# Altium PCB pcb.PcbDoc (part 2 of 2)
Units mil, origin at the board's own origin, x right, y up, seen from the top; angles counter-clockwise.
Board outline 6000 x 4000 mil, 4 copper layers (Top Layer, Ground, Power, Bottom Layer), stack 64.6 mil thick; 209 components, 184 nets, 1089 pads, 303 vias.
Unrouted connection lines stored in the file: 45.
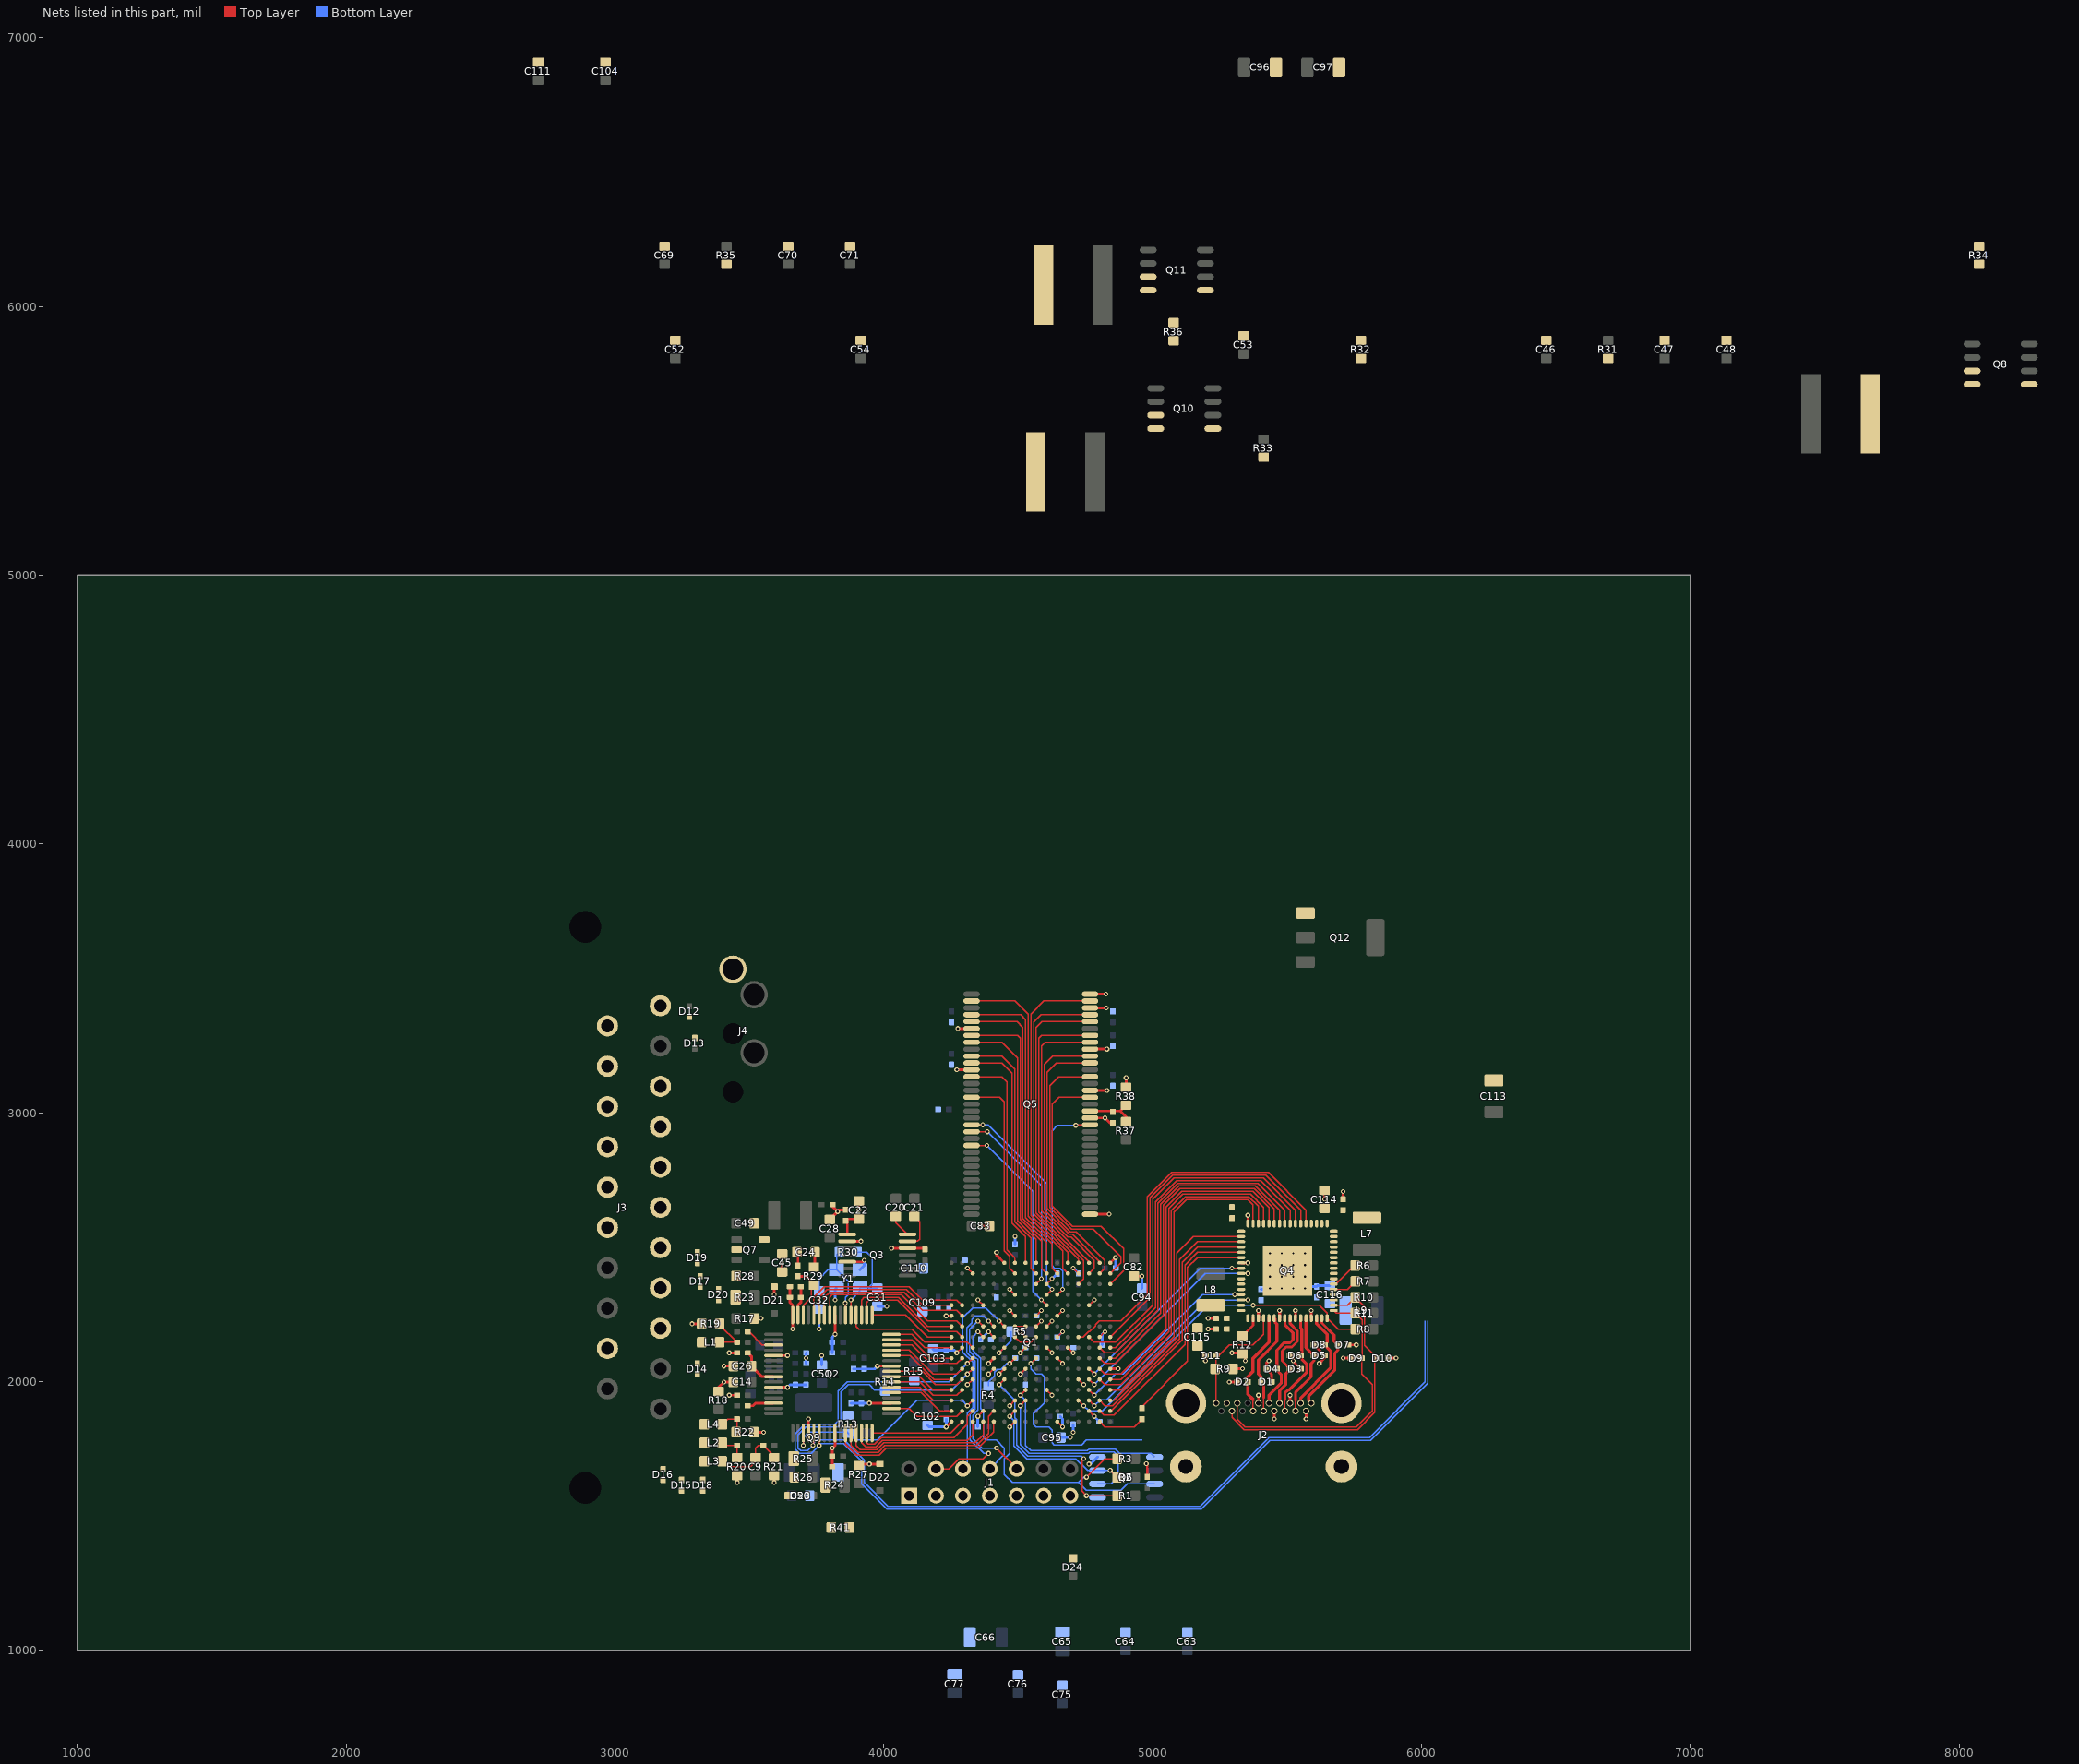
[diagram p2: the nets of this part, all layers, seen from the top]

## Via types
v1: diameter 18, hole 10, Top Layer to Bottom Layer, 287 vias
v2: diameter 19.68, hole 7.87, Top Layer to Bottom Layer, 16 vias

## Nets (pads, with @x,y where several pads share a name; then routed paths per layer and width w, separated by ;. In a path a pad name is that pad's centre, name@x,y a point inside that pad or via, vN(x,y) a via of type N, cw(c..) or ccw(c..) an arc to the next point about the centre after c; other vN are vias at no path point) (continued)
DONE: Q1.H10 R41.1 | length 773.4
  Top Layer w5: v1(4547.24,2066.93) Q1.H10@4566.93,2086.61
  Bottom Layer w5: v1(4547.24,2066.93) 4547.24,2047.24 4566.93,2027.56 4587.01,2027.56 4596.86,2017.72 4596.86,1919.69 4557.09,1879.92 4557.09,1840.55 4566.93,1830.71 4614.17,1830.71 4625.98,1818.9 4625.98,1771.65 4633.86,1763.78 4736.22,1763.78 4753.94,1781.5 4960.63,1781.5
DQ0: Q1.E2 Q5.2 | length 1256.7
  Top Layer w5: Q5.2@4326.77,3415.35 4488.19,3415.35 4537.4,3366.14 4537.4,2614.38 4665.35,2486.43 4665.35,2421.26 Q1.E2@4685.04,2401.57
DQ1: Q1.F2 Q5.4 | length 1201.8
  Top Layer w5: Q5.4@4326.77,3364.17 4509.69,3364.17 4527.4,3346.46 4527.4,2610.24 4625.98,2511.66 4625.98,2421.26 Q1.F2@4645.67,2401.57
DQ2: Q1.G1 Q5.5 | length 1112.4
  Top Layer w5: Q5.5@4326.77,3338.58 4495.75,3338.58 4517.4,3316.93 4517.4,2606.1 4606.3,2517.2 Q1.G1@4606.3,2440.94
DQ3: Q1.G2 Q5.7 | length 1101.7
  Top Layer w5: Q5.7@4326.77,3287.4 4497.56,3287.4 4507.4,3277.56 4507.4,2601.95 4586.61,2522.74 4586.61,2421.26 Q1.G2@4606.3,2401.57
DQ4: Q1.H1 Q5.8 | length 986.1
  Top Layer w5: Q5.8@4326.77,3261.81 4438.98,3261.81 4497.4,3203.39 4497.4,2597.81 4566.93,2528.28 Q1.H1@4566.93,2440.94
DQ5: Q1.H2 Q5.10 | length 974.3
  Top Layer w5: Q5.10@4326.77,3210.63 4438.98,3210.63 4487.4,3162.2 4487.4,2593.67 4547.24,2533.83 4547.24,2421.26 Q1.H2@4566.93,2401.57
DQ6: Q1.J1 Q5.11 | length 893
  Top Layer w5: Q5.11@4326.77,3185.04 4438.98,3185.04 4477.4,3146.61 4477.4,2589.53 4527.56,2539.37 Q1.J1@4527.56,2440.94
DQ7: Q1.K1 Q5.13 | length 825.5
  Top Layer w5: Q5.13@4326.77,3133.86 4438.98,3133.86 4458.66,3114.17 4458.66,2490.16 4488.19,2460.63 Q1.K1@4488.19,2440.94
DQ8: Q1.A2 Q5.54 | length 1036.5
  Top Layer w5: Q5.54@4767.72,3133.86 4650.87,3133.86 4617.4,3100.39 4617.4,2647.52 4697.95,2566.97 4779.2,2566.97 4881.89,2464.28 4881.89,2440.94 Q1.A2@4842.52,2401.57
DQ9: Q1.B2 Q5.56 | length 1033.8
  Top Layer w5: Q5.56@4767.72,3185.04 4642.83,3185.04 4607.4,3149.61 4607.4,2643.37 4693.8,2556.97 4716.65,2556.97 4822.84,2450.79 4822.84,2421.26 Q1.B2@4803.15,2401.57
DQ10: Q1.B1 Q5.57 | length 1013.7
  Top Layer w5: Q5.57@4767.72,3210.63 4628.9,3210.63 4597.4,3179.13 4597.4,2639.23 4689.66,2546.97 4701.42,2546.97 4803.15,2445.25 Q1.B1@4803.15,2440.94
DQ11: Q1.C2 Q5.59 | length 1128.7
  Top Layer w5: Q1.C2@4763.78,2401.57 4783.47,2421.26 4783.47,2450.79 4697.28,2536.97 4685.52,2536.97 4587.4,2635.09 4587.4,3248.03 4601.18,3261.81 Q5.59@4767.72,3261.81
DQ12: Q1.C1 Q5.60 | length 1108.6
  Top Layer w5: Q1.C1@4763.78,2440.94 4763.78,2445.25 4682.05,2526.97 4681.38,2526.97 4577.4,2630.95 4577.4,3277.56 4587.24,3287.4 Q5.60@4767.72,3287.4
DQ13: Q1.D3 Q5.62 | length 1245.7
  Top Layer w5: Q1.D3@4724.41,2362.2 4744.1,2381.89 4744.1,2450.79 4677.91,2516.97 4677.24,2516.97 4567.4,2626.81 4567.4,3316.93 4589.06,3338.58 Q5.62@4767.72,3338.58
DQ14: Q1.D1 Q5.63 | length 1186.6
  Top Layer w5: Q1.D1@4724.41,2440.94 4724.41,2455.66 4557.4,2622.66 4557.4,3336.61 4584.96,3364.17 Q5.63@4767.72,3364.17
DQ15: Q1.E1 Q5.65 | length 1222.9
  Top Layer w5: Q1.E1@4685.04,2440.94 4685.04,2480.88 4547.4,2618.52 4547.4,3366.14 4596.61,3415.35 Q5.65@4767.72,3415.35
ELPF: C23.2 Q2.30 R29.2 | length 203.7
  Top Layer w5: Q2.30@3700.79,2247.05 3700.79,2283.46 3730.16,2312.83 3730.16,2348.27 R29.2@3740.16,2358.27 R29.2@3740.16,2364.17
  Top Layer w10: C23.2@3681.1,2391.14 3713.19,2391.14 R29.2@3740.16,2364.17
FIELD: Q1.P15 Q2.63 | length 500.9
  Top Layer w5: Q2.63@3937.01,1808.07 3937.01,1771.65 3942.54,1766.12 3966.54,1766.12 3991.75,1791.34 4261.81,1791.34 4311.02,1840.55 4311.02,1870.08 Q1.P15@4330.71,1889.76
GND: C1.1 C2.1 C13.2 C14.1 C15.1 C19.1 C22.2 C25.2 C26.1 C27.1 C28.2 C29.2 C30.2 C31.1 C32.1 C33.1 C34.1 C35.1 C36.1 C37.1 C38.1 C39.1 C40.1 C41.1 C42.1 C43.1 C44.1 C45.2 C46.2 C48.2 C49.2 C50.2 C51.2 C52.2 C54.2 C55.2 C56.2 C57.2 C58.2 C59.1 C60.1 C61.1 C62.1 C63.2 C64.2 C65.2 C66.2 C67.1 C68.1 C69.2 C71.2 C72.1 C73.1 C74.1 C75.2 C76.2 C77.2 C78.1 C79.1 C80.1 C81.1 C82.2 C83.2 C84.1 C85.1 C86.1 C87.1 C88.1 C89.1 C90.1 C91.1 C92.1 C93.1 C94.2 C95.2 C96.2 C97.2 C98.1 C99.1 C100.1 C101.1 C102.2 C103.2 C104.2 C105.1 C106.1 C107.1 C108.1 C109.2 C110.2 C111.2 C112.2 C113.2 C114.1 C115.1 C116.2 D1.1 D2.1 D3.1 D4.1 D5.1 D6.1 D7.1 D8.1 D9.1 D10.1 D11.1 D12.1 D13.1 D14.1 D15.1 D16.1 D17.1 D18.1 D19.1 D20.1 D21.A D22.A D23.A J1.1 J1.3 J1.5 J1.7 J1.9 J1.11 J1.13 J2.0 J2.2 J2.5 J2.8 J2.11 J2.17 J3.4 J3.5 J3.9 J3.13 J3.14 J3.17 J3.18 J3.21 J4.1 Q1.A1 Q1.A11 Q1.B8 Q1.C5 Q1.C15 Q1.D2 Q1.D12 Q1.E9 Q1.F6 Q1.F8 Q1.F10 Q1.F16 Q1.G3 Q1.G7 Q1.G9 Q1.G13 Q1.H6 Q1.H7 Q1.J8 Q1.J9 Q1.J11 Q1.K4 Q1.K6 Q1.K14 Q1.L1 Q1.L11 Q1.M8 Q1.M10 Q1.M11 Q1.N5 Q1.N15 Q1.P2 Q1.P12 Q1.R9 Q1.T6 Q1.T16 Q2.3 Q2.10 Q2.24 Q2.32 Q2.37 Q2.43 Q2.52 Q2.57 Q3.2 Q3.5 Q3.12 Q4.7 Q4.10 Q4.11 Q4.12 Q4.26 Q4.39 Q4.40 Q4.41 Q4.42 Q4.43 Q4.44 Q4.45 Q4.46 Q4.47 Q4.50 Q4.51 Q4.52 Q4.64 Q4.65 Q5.6 Q5.12 Q5.34 Q5.48 Q5.52 Q5.58 Q5.64 Q5.66 Q6.4 Q7.2 Q8.4 Q9.1 Q10.4 Q11.4 Q12.1 R9.1 R12.1 R13.2 R17.2 R18.2 R19.1 R20.1 R21.1 R22.1 R26.1 R27.1 R28.1 R32.2 R34.2 R36.2 R38.2 Y1.2 Y1.4 | length 5417.9
  Top Layer w5: v1(4271.65,2106.3) Q1.R9@4291.34,2125.98 ; v1(4311.02,1988.19) Q1.P12@4330.71,2007.87 ; v1(4311.02,2421.26) Q1.P2@4330.71,2401.57 ; v1(4350.39,1870.08) Q1.N15@4370.08,1889.76 ; v1(4350.39,2303.15) Q1.N5@4370.08,2283.46 ; v1(4389.76,2027.56) Q1.M11@4409.45,2047.24 ; v1(4389.76,2185.04) Q1.M8@4409.45,2165.35 ; v1(4429.13,2027.56) Q1.L11@4448.82,2047.24 ; v1(4468.5,1909.45) Q1.K14@4488.19,1929.13 ; v1(4468.5,2263.78) Q1.K6@4488.19,2244.09 ; v1(4468.5,2342.52) Q1.K4@4488.19,2322.83 ; v1(4507.87,2027.56) Q1.J11@4527.56,2047.24 ; v1(4507.87,2106.3) Q1.J9@4527.56,2125.98 ; v1(4507.87,2185.04) Q1.J8@4527.56,2165.35 ; Q1.H7@4566.93,2204.72 v1(4586.62,2224.41) ; Q1.H6@4566.93,2244.09 v1(4586.62,2263.78) ; Q1.G13@4606.3,1968.5 v1(4625.99,1948.82) ; Q1.G9@4606.3,2125.98 v1(4625.99,2106.3) ; Q1.G7@4606.3,2204.72 v1(4625.99,2224.41) ; Q1.G3@4606.3,2362.2 v1(4625.99,2381.89) ; Q1.F16@4645.67,1850.39 v1(4665.36,1830.71) ; Q1.F10@4645.67,2086.61 v1(4665.36,2066.93) ; Q1.F8@4645.67,2165.35 v1(4665.36,2185.04) ; Q1.F6@4645.67,2244.09 v1(4665.36,2263.78) ; Q1.E9@4685.04,2125.98 v1(4704.73,2106.3) ; v1(4704.72,2421.26) Q1.D2@4724.41,2401.57 ; Q1.D12@4724.41,2007.87 v1(4744.1,1988.19) ; Q1.C15@4763.78,1889.76 v1(4783.47,1870.08) ; Q1.C5@4763.78,2283.46 v1(4783.47,2303.15) ; Q1.B8@4803.15,2165.35 v1(4822.84,2185.04)
  Top Layer w10: v1(3287.4,2214.57) R19.1@3322.83,2214.57 ; R18.2@3385.83,1962.6 3385.83,1978.35 v1(3405.51,1998.03) C14.1@3440.94,1998.03 ; v1(3405.51,2057.09) C26.1@3440.94,2057.09 ; v1(3425.2,1948.82) C15.1@3454.13,1948.82 ; v1(3425.2,2106.3) C27.1@3454.13,2106.3 ; v1(3454.72,1624.02) R20.1@3454.72,1649.61 ; R22.1@3517.72,1811.02 v1(3553.15,1811.02) ; R17.2@3517.72,2234.25 v1(3543.31,2234.25) ; Q2.43@3589.57,1978.35 v1(3641.73,1978.35) ; Q2.37@3589.57,2096.46 v1(3641.73,2096.46) ; v1(3592.52,1624.02) R21.1@3592.52,1649.61 ; v1(3592.52,2322.83) D21.A@3592.52,2352.36 ; C45.2@3622.05,2407.48 v1(3622.05,2440.94) ; C44.1@3650.98,2352.36 C43.1@3650.98,2312.99 3650.98,2293.9 3661.42,2283.46 Q2.32@3661.42,2247.05 v1(3661.42,2194.88) ; Q2.52@3720.47,1808.07 v1(3720.47,1860.24) ; C28.2@3799.21,2602.36 v1(3828.74,2631.89) ; C38.1@3808.46,1683.07 C37.1@3808.46,1722.44 3808.46,1751.38 v1(3809.05,1751.96) 3818.9,1761.82 Q2.57@3818.9,1808.07 ; C29.2@3809.65,2657.48 3809.65,2650.98 v1(3828.74,2631.89) ; v1(3818.9,2175.2) Q2.24@3818.9,2247.05 ; C25.2@3858.27,2638.39 3835.24,2638.39 v1(3828.74,2631.89) ; Q3.5@3864.17,2444.88 3921.26,2444.88 v1(3927.17,2450.79) ; Q3.2@3864.17,2521.65 v1(3915.35,2521.65) ; R27.1@3907.48,1687.01 3913.39,1692.91 v1(3946.85,1692.91) D22.A@3986.22,1692.91 ; v1(3907.48,2637.8) C22.2@3907.48,2671.26 ; v1(3946.85,1919.29) Q2.3@4028.54,1919.29 ; v1(3976.38,2057.09) Q2.10@4028.54,2057.09 ; v1(4029.53,2496.06) Q3.12@4088.58,2496.06 4148.23,2496.06 C30.2@4153.54,2490.75 ; v1(4232.28,1830.71) Q1.T16@4251.97,1850.39 ; v1(4232.28,2244.09) Q1.T6@4251.97,2244.09 ; v1(4271.65,3159.45) Q5.12@4326.77,3159.45 ; v1(4275.59,3312.99) Q5.6@4326.77,3312.99 ; v1(4360.24,2578.74) C83.2@4393.7,2578.74 ; v1(4389.76,2066.93) Q1.M10@4409.45,2086.61 ; v1(4419.29,2480.32) 4419.29,2470.47 Q1.L1@4448.82,2440.94 ; Q5.34@4767.72,2622.05 v1(4838.58,2622.05) ; Q5.48@4767.72,2980.32 v1(4822.83,2980.32) 4841.14,2962.01 C112.2@4852.36,2962.01 ; Q5.52@4767.72,3082.68 v1(4830.71,3082.68) ; Q5.58@4767.72,3236.22 v1(4830.71,3236.22) ; Q5.64@4767.72,3389.76 v1(4828.74,3389.76) ; Q5.66@4767.72,3440.94 v1(4826.77,3440.94) ; Q1.A11@4842.52,2047.24 v1(4872.05,2047.24) ; Q1.A1@4842.52,2440.94 v1(4862.21,2460.63) ; R38.2@4901.57,3094.49 v1(4901.57,3129.92) ; C82.2@4931.1,2391.73 v1(4960.63,2391.73) ; v1(4976.69,1693.7) 4980.31,1690.07 C1.1@4980.31,1644.29 ; v1(5196.85,2076.77) D11.1@5196.85,2096.46 ; v1(5206.69,2194.88) C58.2@5235.63,2194.88 ; v1(5206.69,2234.25) C57.2@5235.63,2234.25 ; v1(5285.43,1998.03) D2.1@5314.96,1998.03 ; v1(5295.28,2106.3) 5330.71,2106.3 R12.1@5334.65,2102.36 5344.49,2092.52 v1(5344.49,2076.77) ; R9.1@5299.21,2047.24 v1(5334.65,2047.24) ; Q4.7@5329.72,2440.94 v1(5354.33,2440.94) ; Q4.64@5354.33,2587.6 v1(5354.33,2618.11) ; J2.11@5393.7,1919.29 v1(5393.7,1948.82) ; v1(5433.07,2076.77) 5423.23,2066.93 D4.1@5423.23,2047.24 5442.91,2027.56 D1.1@5442.91,1998.03 ; v1(5452.76,1860.24) J2.8@5452.76,1889.76 ; J2.5@5511.81,1919.29 v1(5511.81,1948.82) ; D6.1@5511.81,2096.46 5523.62,2084.65 v1(5523.62,2076.77) 5523.62,2074.8 D3.1@5551.18,2047.24 ; Q4.26@5531.5,2235.24 v1(5531.5,2263.78) ; v1(5570.87,1860.24) J2.2@5570.87,1889.76 ; D8.1@5600.39,2135.83 D5.1@5639.76,2096.46 5639.76,2086.61 v1(5620.08,2066.93) ; v1(5639.76,2677.17) C114.1@5639.76,2710.63 ; v1(5708.66,2086.61) D9.1@5738.19,2086.61 ; C55.2@5708.66,2677.76 v1(5708.66,2706.69) ; D7.1@5728.35,2135.83 v1(5757.87,2135.83) ; D10.1@5875.98,2086.61 v1(5905.51,2086.61)
  Bottom Layer w10: v1(3641.73,1978.35) 3650.98,1987.6 C42.1@3671.26,1987.6 C41.1@3710.63,1987.6 ; C19.1@3711.22,2066.93 C13.2@3711.22,2106.3 ; v1(3759.84,2194.88) C32.1@3759.84,2269.69 ; C51.2@3769.68,2061.02 v1(3769.68,2096.46) ; C40.1@3808.46,2106.3 C39.1@3808.46,2145.67 3808.46,2164.76 v1(3818.9,2175.2) ; v1(3818.9,2303.15) 3818.9,2342.52 Y1.2@3824.8,2348.43 ; C36.1@3877.95,1918.7 C35.1@3917.32,1918.7 3946.26,1918.7 v1(3946.85,1919.29) ; C33.1@3887.8,2046.65 C34.1@3927.17,2046.65 3965.94,2046.65 v1(3976.38,2057.09) ; Y1.4@3911.42,2415.35 3927.17,2431.1 v1(3927.17,2450.79) ; C31.1@3976.38,2279.53 v1(4011.81,2279.53) ; C102.2@4163.39,1836.61 4169.29,1830.71 v1(4232.28,1830.71) C98.1@4232.28,1859.65 ; C103.2@4183.07,2120.08 4186.42,2116.73 C100.1@4232.28,2116.73 4261.22,2116.73 v1(4271.65,2106.3) ; C99.1@4349.8,1830.71 4349.8,1869.49 v1(4350.39,1870.08) ; C101.1@4360.24,2156.1 4389.17,2185.04 v1(4389.76,2185.04) ; C79.1@4488.19,2510.43 v1(4488.19,2539.37) ; v1(4625.99,2381.89) 4626.58,2381.89 C81.1@4645.67,2400.98 ; C2.1@4646.26,2165.35 4646.26,2165.94 v1(4665.36,2185.04) ; C92.1@4656.1,1870.08 4665.36,1860.83 v1(4665.36,1830.71) ; C95.2@4659.45,1791.34 v1(4694.88,1791.34) ; v1(4704.72,1811.02) C93.1@4704.72,1839.96 ; v1(4704.72,2421.26) 4705.31,2421.26 C78.1@4724.41,2402.17 ; v1(4763.78,1692.91) 4769.49,1692.91 Q6.4@4795.28,1718.7 ; v1(4783.47,1870.08) 4783.47,1869.49 C91.1@4802.56,1850.39 ; C90.1@4812.99,2136.42 4812.99,2175.2 v1(4822.84,2185.04) ; v1(4862.21,2460.63) 4862.8,2460.04 C80.1@4862.8,2421.26 ; C94.2@4960.63,2346.46 v1(4960.63,2391.73) ; C68.1@5403.54,2343.11 5433.66,2343.11 v2(5437.01,2346.46) ; v2(5566.93,2346.46) 5573.43,2352.95 C67.1@5610.24,2352.95 5613.58,2356.3 C116.2@5659.45,2356.3
  other v1: 3711.22,2086.61
  other v2: 5480.31,2346.46 5523.62,2346.46 5437.01,2389.76 5480.31,2389.76 5523.62,2389.76 5566.93,2389.76 5437.01,2433.07 5480.31,2433.07 5523.62,2433.07 5566.93,2433.07 5437.01,2476.38 5480.31,2476.38 5523.62,2476.38 5566.93,2476.38
HD0_N: D4.2 J2.9 Q4.24 | length 391.9
  Top Layer w11: J2.9@5433.07,1919.29 5433.07,1948.82 5479.2,1994.95 5479.2,2024.01 5462.6,2040.62 D4.2@5462.6,2047.24 5462.6,2116.14 5490.61,2144.16 5511.51,2144.16 5522.87,2155.51 5522.87,2180.88 5492.13,2211.62 Q4.24@5492.13,2235.24
HD0_P: D3.2 J2.7 Q4.25 | length 391.4
  Top Layer w11: J2.7@5472.44,1919.29 5472.44,1965.56 5495.2,1988.33 5495.2,2027.56 5511.81,2044.17 D3.2@5511.81,2047.24 5482.28,2076.77 5482.28,2113.2 5497.24,2128.16 5518.14,2128.16 5538.87,2148.88 5538.87,2187.51 5511.81,2214.56 Q4.25@5511.81,2235.24
HD1_N: D6.2 J2.6 Q4.27 | length 393.7
  Top Layer w5: J2.6@5492.13,1889.76 5492.13,1931.69
  Top Layer w11: 5492.13,1931.69 5492.13,1946.19 5492.31,1946.38 5492.31,1956.9 5503.73,1968.32 5507.61,1968.32 5573.49,2034.21 5573.49,2064.3 5551.18,2086.61 D6.2@5551.18,2096.46 5554.87,2100.14 5554.87,2194.13 5551.18,2197.82 Q4.27@5551.18,2235.24
HD1_P: D5.2 J2.4 Q4.28 | length 386.2
  Top Layer w5: J2.4@5531.5,1889.76 5531.5,1929.13
  Top Layer w11: 5531.5,1929.13 5531.5,1958.66 5589.49,2016.66 5589.49,2065.87 5600.39,2076.77 D5.2@5600.39,2096.46 5570.87,2125.98 Q4.28@5570.87,2235.24
HD2_N: D8.2 J2.3 Q4.30 | length 391.5
  Top Layer w11: J2.3@5551.18,1919.29 5551.18,1938.98 5662.07,2049.87 5662.07,2113.52 D8.2@5639.76,2135.83 5649.61,2145.67 5649.61,2175.2 5610.24,2214.57 Q4.30@5610.24,2235.24
HD2_P: D7.2 J2.1 Q4.31 | length 389.3
  Top Layer w11: J2.1@5590.55,1919.29 5580.71,1929.13 5580.71,1945.88 5678.07,2043.24 5678.07,2105.24 5688.98,2116.14 D7.2@5688.98,2135.83 5675.45,2149.35 5675.45,2171.98 5629.92,2217.51 Q4.31@5629.92,2235.24
HDAVDD: C67.2 C68.2 C116.1 L9.1 Q4.19 Q4.23 Q4.29 | length 85.6
  Top Layer w11: Q4.19@5393.7,2235.24 v1(5393.7,2263.78) ; Q4.23@5472.44,2235.24 v1(5472.44,2263.78) ; Q4.29@5590.55,2235.24 v1(5590.55,2263.78)
HDC_N: D2.2 J2.12 Q4.21 | length 386.2
  Top Layer w5: J2.12@5374.02,1889.76 5374.02,1932.39
  Top Layer w12: 5374.02,1932.39 5354.33,1952.08 D2.2@5354.33,1998.03 5354.33,2017.71 5374.02,2037.4 5374.02,2086.61 5433.07,2145.67 Q4.21@5433.07,2235.24
HDC_P: D1.2 J2.10 Q4.22 | length 386.2
  Top Layer w5: J2.10@5413.39,1889.76 5413.39,1938.98
  Top Layer w11: 5413.39,1938.98 5413.39,1988.19 D1.2@5403.54,1998.03 5403.54,2017.71 5393.7,2027.56 5393.7,2079.78 5462.6,2148.68 5462.6,2213.02 5456.04,2219.58 5456.04,2231.96 Q4.22@5452.76,2235.24
HDCLK: Q4.6 R40.1 | length 806.8
  Top Layer w5: R40.1@4957.83,1903 5130.31,2075.48 5130.31,2423.62 5167.32,2460.63 Q4.6@5329.72,2460.63
HDCLK1: Q1.B16 R40.2 | length 177.6
  Top Layer w5: Q1.B16@4803.15,1850.39 4822.83,1830.71 4931.69,1830.71 R40.2@4960.63,1859.65
HDD0: Q1.A14 Q4.2 | length 924.2
  Top Layer w5: Q1.A14@4842.52,1929.13 4856.66,1929.13 5090.31,2162.79 5090.31,2477.28 5152.41,2539.37 Q4.2@5329.72,2539.37
HDD1: Q1.A13 Q4.63 | length 1174.8
  Top Layer w5: Q1.A13@4842.52,1968.5 4881.89,1968.5 5080.31,2166.93 5080.31,2630.77 5126.71,2677.17 5354.33,2677.17 5374.02,2657.48 Q4.63@5374.02,2587.6
HDD2: Q1.B12 Q4.62 | length 1235.6
  Top Layer w5: Q1.B12@4803.15,2007.87 4822.83,1988.19 4881.89,1988.19 5070.31,2176.61 5070.31,2634.91 5122.57,2687.17 5358.47,2687.17 5393.7,2651.94 Q4.62@5393.7,2587.6
HDD3: Q1.A12 Q4.61 | length 1205.4
  Top Layer w5: Q1.A12@4842.52,2007.87 4881.89,2007.87 5060.31,2186.3 5060.31,2644.6 5112.88,2697.17 5363.86,2697.17 5413.39,2647.64 Q4.61@5413.39,2587.6
HDD4: Q1.B11 Q4.60 | length 1269.5
  Top Layer w5: Q1.B11@4803.15,2047.24 4822.83,2027.56 4881.89,2027.56 5050.31,2195.98 5050.31,2648.74 5108.74,2707.17 5373.54,2707.17 5433.07,2647.64 5433.07,2627.95 Q4.60@5433.07,2587.6
HDD5: Q1.B10 Q4.59 | length 1252.9
  Top Layer w5: Q1.B10@4803.15,2086.61 4822.83,2066.93 4862.2,2066.93 5040.31,2245.04 5040.31,2655.05 5102.43,2717.17 5377.69,2717.17 5452.76,2642.09 Q4.59@5452.76,2587.6
HDD6: Q1.A10 Q4.58 | length 1218.7
  Top Layer w5: Q1.A10@4842.52,2086.61 4862.2,2086.61 5030.31,2254.72 5030.31,2659.2 5098.28,2727.17 5381.83,2727.17 5472.44,2636.55 Q4.58@5472.44,2587.6
HDD7: Q1.B9 Q4.57 | length 1283.5
  Top Layer w5: Q1.B9@4803.15,2125.98 4822.83,2106.3 4862.2,2106.3 5020.31,2264.41 5020.31,2663.34 5094.14,2737.17 5392.76,2737.17 5492.13,2637.8 Q4.57@5492.13,2587.6
HDD8: Q1.A9 Q4.56 | length 1252.5
  Top Layer w5: Q1.A9@4842.52,2125.98 4862.2,2125.98 5010.31,2274.09 5010.31,2667.48 5090,2747.17 5402.44,2747.17 5511.81,2637.8 Q4.56@5511.81,2587.6
HDD9: Q1.C8 Q4.55 | length 1359.4
  Top Layer w5: Q1.C8@4763.78,2165.35 4783.46,2145.67 4862.2,2145.67 5000.31,2283.78 5000.31,2677.48 5080,2757.17 5412.13,2757.17 5531.5,2637.8 Q4.55@5531.5,2587.6
HDD10: Q1.A8 Q4.54 | length 1278.3
  Top Layer w5: Q1.A8@4842.52,2165.35 4990.31,2313.15 4990.31,2682.87 5074.61,2767.17 5421.81,2767.17 5551.18,2637.8 Q4.54@5551.18,2587.6
HDD11: Q1.D8 Q4.53 | length 1423.5
  Top Layer w5: Q1.D8@4724.41,2165.35 4742.04,2165.35 4761.72,2185.04 4765.84,2185.04 4787.78,2206.98 4787.78,2211.09 4801.09,2224.41 4881.89,2224.41 4980.31,2322.83 4980.31,2687.01 5070.47,2777.17 5431.5,2777.17 5570.87,2637.8 Q4.53@5570.87,2587.6
HDDE: Q1.B14 Q4.3 | length 959.7
  Top Layer w5: Q1.B14@4803.15,1929.13 4822.83,1909.45 4851.12,1909.45 5100.31,2158.64 5100.31,2452.68 5167.32,2519.68 Q4.3@5329.72,2519.68
HDDVDD: C55.1 C56.1 C114.2 L7.1 Q4.1 Q4.48 Q4.49
HDHPD: D11.2 J2.19 Q4.20 R9.2 | length 441.2
  Top Layer w5: J2.19@5236.22,1919.29 5236.22,2086.61 5285.43,2135.83 5374.02,2135.83 5413.39,2175.2 Q4.20@5413.39,2235.24
HDHS: Q1.A15 Q4.4 | length 909
  Top Layer w5: Q1.A15@4842.52,1889.76 4845.58,1889.76 5110.31,2154.5 5110.31,2442.99 5167.32,2500 Q4.4@5329.72,2500
HDI2S0: Q1.C12 Q4.9 | length 802.7
  Top Layer w5: Q1.C12@4763.78,2007.87 v1(4783.47,1988.19) ; Q4.9@5321.59,2401.57 Q4.9@5329.72,2401.57 v1(5354.33,2401.57)
  Bottom Layer w5: v1(4783.47,1988.19) 5196.85,2401.57 v1(5354.33,2401.57)
HDINT: Q1.D14 Q4.32 R8.1 | length 1256.5
  Top Layer w5: Q1.D14@4724.41,1929.13 v1(4744.1,1909.45) ; v1(5374,2283.45) 5620.08,2283.45 5649.61,2253.92 Q4.32@5649.61,2235.24 5689.96,2194.88 R8.1@5753.94,2194.88
  Bottom Layer w5: v1(4744.1,1909.45) 4763.78,1889.76 4812.99,1889.76 5206.69,2283.46 v1(5374,2283.45)
HDLRCLK: Q1.C14 Q4.14 | length 786.4
  Top Layer w5: Q1.C14@4763.78,1929.13 v1(4783.47,1909.45) ; Q4.14@5329.72,2303.15 v1(5354.33,2303.15)
  Bottom Layer w5: v1(4783.47,1909.45) 4806.34,1932.32 4829.67,1932.32 5200.5,2303.15 v1(5354.33,2303.15)
HDMCLK: Q1.C11 Q4.8 | length 737.2
  Top Layer w5: Q1.C11@4763.78,2047.24 v1(4783.47,2027.56) ; v1(5295.28,2421.26) Q4.8@5329.72,2421.26
  Bottom Layer w5: v1(4783.47,2027.56) 5177.17,2421.26 v1(5295.28,2421.26)
HDPVDD: C57.1 C58.1 C115.2 L8.1 Q4.15 Q4.16 Q4.17
HDSCL: D9.2 J2.15 Q4.33 R11.2 | length 1073.1
  Top Layer w5: J2.15@5314.96,1919.29 5314.96,1860.24 5344.49,1830.71 5757.87,1830.71 5816.93,1889.76 5816.93,1988.19 5777.56,2027.56 D9.2@5777.56,2086.61 5779.15,2088.21 5779.15,2228.72 R11.2@5753.94,2253.94 5684.06,2253.94 Q4.33@5674.21,2263.78
HDSCLK: Q1.C13 Q4.13 | length 729
  Top Layer w5: Q1.C13@4763.78,1968.5 v1(4783.47,1948.82) ; v1(5305.12,2322.83) Q4.13@5329.72,2322.83
  Bottom Layer w5: v1(4783.47,1948.82) 4862.21,2027.56 4891.73,2027.56 5187.01,2322.83 v1(5305.12,2322.83)
HDSDA: D10.2 J2.16 Q4.34 R10.2 | length 1158.8
  Top Layer w5: J2.16@5295.28,1889.76 5295.28,1865.78 5340.35,1820.71 5762.02,1820.71 5826.93,1885.62 5826.93,2076.93 D10.2@5836.61,2086.61 5789.15,2134.07 5789.15,2277.78 R10.2@5753.94,2312.99 5724.41,2283.46 Q4.34@5674.21,2283.46
HDVS: Q1.B15 Q4.5 | length 956.9
  Top Layer w5: Q1.B15@4803.15,1889.76 4818.52,1874.39 4856.67,1874.39 5120.31,2138.03 5120.31,2433.31 5167.32,2480.32 Q4.5@5329.72,2480.31
HS: Q1.R15 Q2.2 | length 283.2
  Top Layer w5: Q2.2@4028.54,1899.61 4094.49,1899.61 4124.02,1870.08 4271.65,1870.08 Q1.R15@4291.34,1889.76
INIT: Q1.K10 R4.1 | length 158.8
  Top Layer w5: v1(4468.5,2066.93) Q1.K10@4488.19,2086.61
  Bottom Layer w5: R4.1@4389.76,1982.28 4389.76,1998.03 4412.63,2020.9 4412.63,2034.39 4422.3,2044.06 4435.79,2044.06 4458.66,2066.93 v1(4468.5,2066.93)
LDM: Q1.G4 Q5.20 | length 799.7
  Top Layer w5: Q5.20@4326.77,2954.72 v1(4368.11,2954.72) ; Q1.G4@4606.3,2322.83 v1(4625.99,2342.52)
  Bottom Layer w5: v1(4368.11,2954.72) 4387.8,2954.72 4606.3,2736.22 4606.3,2362.21 v1(4625.99,2342.52)
LDQS: Q1.K2 Q5.16 | length 783.9
  Top Layer w5: Q5.16@4326.77,3057.09 4431.81,3057.09 4448.66,3040.24 4448.66,2486.02 4468.5,2466.17 4468.5,2421.26 Q1.K2@4488.19,2401.57
LLC: Q1.P9 Q2.20 | length 508
  Top Layer w5: Q2.20@3897.64,2247.05 3897.64,2204.72 3907.48,2194.88 4104.33,2194.88 4153.54,2145.67 4311.02,2145.67 Q1.P9@4330.71,2125.98
NetC3_1: C3.1 L1.2 R19.2 | length 159.9
  Top Layer w5: L1.2@3389.76,2145.67 C3.1@3454.13,2145.67 3389.76,2210.04 R19.2@3389.76,2214.57
NetC4_2: C4.2 Q2.35 | length 115.3
  Top Layer w5: C4.2@3494.68,2185.04 3498.39,2185.04 3547.61,2135.83 Q2.35@3589.57,2135.83
NetC5_1: C5.1 L2.2 R20.2 | length 103.3
  Top Layer w5: L2.2@3399.61,1771.65 3409.45,1761.81 C5.1@3454.13,1761.81 R20.2@3454.13,1717.13
NetC6_2: C6.2 Q2.46 | length 99
  Top Layer w10: C6.2@3494.68,1909.45 3513.78,1909.45 3523.62,1919.29 Q2.46@3589.57,1919.29
NetC7_1: C7.1 C9.1 L3.2 R21.2 | length 284.4
  Top Layer w5: L3.2@3399.61,1702.76 3419.29,1683.07 3503.94,1683.07 3523.62,1702.76 C9.1@3523.62,1716.54 3523.62,1751.97 3533.46,1761.81 C7.1@3552.56,1761.81 3592.52,1721.85 R21.2@3592.52,1716.54
NetC8_1: C8.1 L4.2 R22.2 | length 113.3
  Top Layer w5: L4.2@3399.61,1840.55 3419.29,1860.24 C8.1@3454.13,1860.24 3454.13,1814.37 R22.2@3450.79,1811.02
NetC20_2: C20.2 Q3.14 | length 84.9
  Top Layer w5: C20.2@4045.28,2614.17 4045.28,2590.55 Q3.14@4088.58,2547.24
NetC21_2: C21.2 Q3.13 | length 141.3
  Top Layer w5: Q3.13@4088.58,2521.65 4125.98,2521.65 4133.86,2529.53 4133.86,2594.49 C21.2@4114.17,2614.17
NetC22_1: C22.1 C25.1 Q3.1 | length 100
  Top Layer w10: Q3.1@3864.17,2547.24 3864.76,2547.83 3864.76,2604.33 C22.1@3907.48,2604.33
NetC24_2: C24.2 R29.1 | length 56.7
  Top Layer w5: R29.1@3740.16,2425.2 R29.1@3744.09,2429.13
  Top Layer w10: R29.1@3744.09,2429.13 C24.2@3744.09,2480.32
NetC47_2: C47.2 Q8.5 R31.1 R32.1
NetC53_2: C53.2 Q10.5 R33.1 R34.1
NetC70_2: C70.2 Q11.5 R35.1 R36.1
NetD24_K: D24.K R41.2
NetL5_1: L5.1 Q8.3
NetL6_1: L6.1 Q10.3
NetL10_1: L10.1 Q11.3
NetQ1_H8: Q1.H8 Q1.K8 | length 95
  Top Layer w5: Q1.K8@4488.19,2165.35 4507.87,2145.67 4547.24,2145.67 Q1.H8@4566.93,2165.35
NetQ1_J7: Q1.J7 Q1.K7 | length 39.4
  Top Layer w5: Q1.K7@4488.19,2204.72 Q1.J7@4527.56,2204.72
NetQ4_18: Q4.18 R12.2 | length 82.3
  Top Layer w11: R12.2@5334.65,2169.29 5374.02,2208.66 Q4.18@5374.02,2235.24
NetQ4_37: Q4.37 R7.1 | length 92
  Top Layer w5: Q4.37@5674.21,2342.52 5724.41,2342.52 R7.1@5753.94,2372.05
NetQ4_38: Q4.38 R6.1 | length 108.3
  Top Layer w5: Q4.38@5674.21,2362.2 5682.34,2362.2 5751.24,2431.1 R6.1@5753.94,2431.1
P0: Q1.R5 Q2.28 | length 642.3
  Top Layer w5: Q2.28@3740.16,2266.73 3740.16,2312.99 3779.53,2352.36 4094.49,2352.36 4143.7,2303.15 4271.65,2303.15 Q1.R5@4291.34,2283.46
P1: Q1.T5 Q2.27 | length 574.9
  Top Layer w5: Q2.27@3759.84,2266.73 3759.84,2312.99 3789.21,2342.36 4084.8,2342.36 4143.7,2283.46 Q1.T5@4251.97,2283.46
P1V8: C23.1 C24.1 C43.2 C44.2 C45.1 Q2.31 Q7.5 | length 159.9
  Top Layer w5: C24.1@3677.17,2480.32 C24.1@3681.1,2476.38
  Top Layer w10: Q2.31@3681.1,2247.05 3681.1,2283.46 3691.54,2293.9 C43.2@3691.54,2312.99 C44.2@3691.54,2352.36 ; C23.1@3681.1,2431.69 C24.1@3681.1,2476.38
P2: Q1.R6 Q2.26 | length 602.7
  Top Layer w5: Q2.26@3779.53,2266.73 3779.53,2312.99 3798.9,2332.36 4075.12,2332.36 4143.7,2263.78 4271.65,2263.78 Q1.R6@4291.34,2244.09
P3: Q1.R7 Q2.25 | length 591
  Top Layer w5: Q2.25@3799.21,2266.73 3799.21,2312.99 3808.58,2322.36 4065.43,2322.36 4163.38,2224.41 4271.65,2224.41 Q1.R7@4291.34,2204.72
P4: Q1.T7 Q2.19 | length 419.2
  Top Layer w5: Q2.19@3917.32,2266.73 3917.32,2302.76 3926.93,2312.36 4055.75,2312.36 4163.39,2204.72 Q1.T7@4251.97,2204.72
P5: Q1.R8 Q2.18 | length 461.1
  Top Layer w5: Q2.18@3937.01,2247.05 3937.01,2293.31 3946.06,2302.36 4051.61,2302.36 4168.93,2185.04 4271.65,2185.04 Q1.R8@4291.34,2165.35
P6: Q1.T8 Q2.17 | length 329.1
  Top Layer w5: Q2.17@3956.69,2247.05 4081.69,2247.05 4163.39,2165.35 Q1.T8@4251.97,2165.35
P7: Q1.T9 Q2.16 | length 243.8
  Top Layer w5: Q2.16@4028.54,2175.2 4104.33,2175.2 4153.54,2125.98 4232.28,2125.98 Q1.T9@4251.97,2125.98
P8: Q1.T10 Q2.15 | length 252
  Top Layer w5: Q2.15@4028.54,2155.51 4104.33,2155.51 4173.23,2086.61 Q1.T10@4251.97,2086.61
P9: Q1.R10 Q2.14 | length 299.5
  Top Layer w5: Q2.14@4028.54,2135.83 4104.33,2135.83 4173.23,2066.93 4271.65,2066.93 Q1.R10@4291.34,2086.61
P10: Q1.R11 Q2.13 | length 307.6
  Top Layer w5: Q2.13@4028.54,2116.14 4094.49,2116.14 4183.07,2027.56 4271.65,2027.56 Q1.R11@4291.34,2047.24
P11: Q1.T12 Q2.12 | length 260.1
  Top Layer w5: Q2.12@4028.54,2096.46 4098.79,2096.46 4187.37,2007.87 Q1.T12@4251.97,2007.87
P12: Q1.T13 Q2.8 | length 243.8
  Top Layer w5: Q2.8@4028.54,2017.72 4133.86,2017.72 4183.07,1968.5 Q1.T13@4251.97,1968.5
P13: Q1.R13 Q2.7 | length 291.3
  Top Layer w5: Q2.7@4028.54,1998.03 4133.86,1998.03 4183.07,1948.82 4271.65,1948.82 Q1.R13@4291.34,1968.5
P14: Q1.T14 Q2.6 | length 253.7
  Top Layer w5: Q2.6@4028.54,1978.35 4133.86,1978.35 4183.07,1929.13 4232.28,1929.13 ; 4222.44,1929.13 Q1.T14@4251.97,1929.13
P15: Q1.T15 Q2.5 | length 252
  Top Layer w5: Q2.5@4028.54,1958.66 4139.4,1958.66 4208.3,1889.76 Q1.T15@4251.97,1889.76
P16: Q1.P16 Q2.62 | length 524.1
  Top Layer w5: Q2.62@3917.32,1808.07 3917.32,1771.65 3932.85,1756.12 3970.68,1756.12 3995.89,1781.34 4310.87,1781.34 4330.71,1801.18 Q1.P16@4330.71,1850.39
P17: Q1.N16 Q2.61 | length 597.2
  Top Layer w5: Q2.61@3897.64,1808.07 3897.64,1761.81 3913.33,1746.12 3974.82,1746.12 4000.04,1771.34 4340.24,1771.34 4370.08,1801.18 Q1.N16@4370.08,1850.39
P18: Q1.M15 Q2.60 | length 689.2
  Top Layer w5: Q2.60@3877.95,1808.07 3877.95,1761.81 3903.64,1736.12 3978.96,1736.12 4004.18,1761.34 4344.38,1761.34 4389.76,1806.72 ; 4389.76,1806.73 4389.76,1870.08 Q1.M15@4409.45,1889.76
P19: Q1.M16 Q2.59 | length 683.5
  Top Layer w5: Q2.59@3858.27,1808.07 3858.27,1767.35 3899.5,1726.12 3983.1,1726.12 4008.32,1751.34 4349.76,1751.34 4409.45,1811.02 Q1.M16@4409.45,1850.39
PROGRAM: Q1.L9 R5.1 | length 125.3
  Top Layer w5: v1(4429.13,2106.3) Q1.L9@4448.82,2125.98
  Bottom Layer w5: v1(4429.13,2106.3) 4474.41,2151.57 R5.1@4474.41,2185.04
RAS: Q1.G5 Q5.23 | length 743.7
  Top Layer w5: Q5.23@4326.77,2877.95 v1(4383.86,2877.95) ; v1(4586.61,2303.15) Q1.G5@4606.3,2283.46
  Bottom Layer w5: v1(4383.86,2877.95) 4554.37,2707.44 4554.37,2335.39 v1(4586.61,2303.15)
REFOUT: C26.2 C27.2 Q2.41 | length 152.7
  Top Layer w10: C27.2@3494.68,2106.3 3507.87,2093.11 C26.2@3507.87,2057.09 3547.24,2017.72 Q2.41@3589.57,2017.72
RESET: Q1.P14 Q2.51 R13.1 | length 803.6
  Top Layer w5: v1(3700.79,1761.81) Q2.51@3700.79,1808.07 ; v1(4311.02,1909.45) Q1.P14@4330.71,1929.13
  Bottom Layer w5: v1(3700.79,1761.81) 3700.79,1791.34 3720.47,1811.02 3864.17,1811.02 R13.1@3868.11,1807.09 3893.7,1781.5 3976.38,1781.5 4124.02,1929.13 4291.34,1929.13 v1(4311.02,1909.45)
SCARTB: D17.2 J3.7 L4.1
SCARTFB: D20.2 J3.16 R23.2
SCARTG: D16.2 J3.11 L3.1
SCARTHS: D19.2 J3.12 R24.2
SCARTR: D15.2 J3.15 L2.1
SCARTVS: D18.2 J3.10 R25.2
SCARTY: D14.2 J3.20 L1.1
SCL: Q1.P10 Q2.54 Q4.35 R15.1 | length 3893.7
  Top Layer w5: v1(3759.84,1761.81) Q2.54@3759.84,1808.07 ; v1(4311.02,2066.93) Q1.P10@4330.71,2086.61
  Bottom Layer w5: v1(4311.02,2066.93) 4242.28,1998.19 3863.97,1998.19 3830.55,1964.77 3830.55,1852.36 3818.9,1840.71 3706.49,1840.71 3671.1,1805.32 3671.1,1747.83 3686.8,1732.13 3730.16,1732.13 v1(3759.84,1761.81) 3766.5,1768.47 3851.61,1768.47 3917.32,1702.76 3917.32,1619.87 4011.76,1525.43 5181.31,1525.43 5437.21,1781.34 5811.23,1781.34 6023.78,1993.89 6023.78,2224.41
SDA: Q1.P11 Q2.53 Q4.36 R14.1 | length 3859.7
  Top Layer w5: v1(3736.68,1761.98) 3736.84,1761.81 3740.16,1765.13 Q2.53@3740.16,1808.07 ; v1(4311.02,2027.56) Q1.P11@4330.71,2047.24
  Bottom Layer w5: v1(3736.68,1761.98) v1@3736.84,1761.81 ; v1(4311.02,2027.56) 4251.97,1968.5 3966.54,1968.5 3946.85,1988.19 3868.11,1988.19 3840.55,1960.63 3840.55,1842.52 3828.74,1830.71 3710.63,1830.71 3681.1,1801.18 3681.1,1751.97 3690.94,1742.13 3717.16,1742.13 v1@3736.84,1761.81 ; 6013.78,2224.41 6013.78,1998.03 5807.09,1791.34 5433.07,1791.34 5177.17,1535.43 4015.91,1535.43 3927.32,1624.02 3927.32,1706.9 3852.72,1781.5 3750,1781.5 3736.84,1768.34 v1@3736.84,1761.81
SFL: Q1.R12 Q2.9 | length 291.3
  Top Layer w5: Q2.9@4028.54,2037.4 4143.7,2037.4 4192.91,1988.19 4271.65,1988.19 Q1.R12@4291.34,2007.87
SPI0: Q1.J13 Q6.5 | length 725.6
  Top Layer w5: v1(4507.87,1948.82) Q1.J13@4527.56,1968.5
  Bottom Layer w5: v1(4507.87,1948.82) 4527.56,1929.13 4527.56,1762.28 4547.24,1742.6 4742.69,1742.6 4743.01,1742.28 4757.72,1742.28 4763.45,1748.01 4861.09,1748.01 4876.5,1732.6 4993.98,1732.6 Q6.5@5007.87,1718.7
SPI1: Q1.J14 Q6.2 | length 725.1
  Top Layer w5: v1(4507.87,1909.45) Q1.J14@4527.56,1929.13
  Bottom Layer w5: v1(4507.87,1909.45) 4507.87,1764.87 4540.14,1732.6 4738.55,1732.6 4738.87,1732.28 4761.86,1732.28 4767.59,1738.01 4856.95,1738.01 4872.05,1722.91 4872.05,1643.7 4847.05,1618.7 Q6.2@4795.28,1618.7
SPI2: Q1.K15 Q6.3 R2.1 | length 576.8
  Top Layer w5: v1(4468.5,1870.08) Q1.K15@4488.19,1889.76 ; v1(4842.52,1669.29) R2.1@4868.11,1643.7
  Bottom Layer w5: v1(4468.5,1870.08) 4485,1853.58 4485,1759.45 4531.86,1712.6 4714.57,1712.6 4758.46,1668.7 Q6.3@4795.28,1668.7 4795.87,1669.29 v1(4842.52,1669.29)
SPI3: Q1.K16 Q6.7 R3.1 | length 987.1
  Top Layer w5: v1(4468.5,1830.71) Q1.K16@4488.19,1850.39 ; v1(4753.94,1643.7) 4822.83,1712.6 R3.1@4868.11,1712.6
  Bottom Layer w5: v1(4468.5,1830.71) 4468.5,1732.28 4448.82,1712.6 4448.82,1653.54 4478.35,1624.02 4724.41,1624.02 ; v1(4753.94,1643.7) 4744.09,1643.7 4724.41,1624.02 ; Q6.7@5007.87,1618.7 4906.1,1618.7 4881.89,1594.49 4753.94,1594.49 4724.41,1624.02
SPICS: Q1.L12 Q6.1 R1.1 | length 811.9
  Top Layer w5: v1(4429.13,1988.19) Q1.L12@4448.82,2007.87 ; v1(4744.41,1712.6) 4737.44,1705.63 4737.44,1591.3 v1(4753.94,1574.8) R1.1@4868.11,1574.8
  Bottom Layer w5: v1(4429.13,1988.19) 4488.19,1929.13 4488.19,1864.53 4495,1857.72 4495,1763.6 4536,1722.6 4734.41,1722.6 v1(4744.41,1712.6)
TCK: J1.6 Q1.L7 | length 790.4
  Top Layer w5: v1(4429.13,2224.41) Q1.L7@4448.82,2204.72
  Bottom Layer w5: J1.6@4294.49,1674.8 4311.02,1691.34 4311.02,1882.33 4330.71,1902.01 4330.71,2072.14 4294.52,2108.32 4294.52,2237.44 4330.71,2273.62 4379.92,2273.62 v1(4429.13,2224.41)
TDI: J1.10 Q1.N7 | length 710.9
  Top Layer w5: v1(4350.39,2224.41) Q1.N7@4370.08,2204.72 ; v1(4419.29,1751.97) 4494.49,1676.77 J1.10@4494.49,1674.8
  Bottom Layer w5: v1(4350.39,2224.41) 4319.62,2193.64 4319.62,2111.51 4344.3,2086.83 4345.88,2086.83 4350.71,2082 4350.71,1893.73 4331.02,1874.04 4331.02,1787.26 4366.32,1751.97 v1(4419.29,1751.97)
TDO: J1.8 Q1.N8 | length 646.2
  Top Layer w5: v1(4350.39,2185.04) Q1.N8@4370.08,2165.35
  Bottom Layer w5: v1(4350.39,2185.04) 4330.71,2165.36 4330.71,2114.56 4348.44,2096.83 4350.02,2096.83 4360.71,2086.14 4360.71,1899.13 4370.08,1889.76 4370.08,1791.34 4379.92,1781.5 4419.29,1781.5 4448.82,1751.97 4448.82,1729.13 J1.8@4394.49,1674.8 ; 4520,1670 4520,1674.59
TMS: J1.4 Q1.M7 | length 888.9
  Top Layer w5: J1.4@4194.49,1674.8 4242.12,1674.8 4279.15,1711.83 4369.31,1711.83 v1(4389.76,1732.28) ; v1(4389.76,2224.41) Q1.M7@4409.45,2204.72
  Bottom Layer w5: v1(4389.76,1732.28) 4371.86,1732.28 4321.02,1783.12 4321.02,1878.19 4340.71,1897.87 4340.71,2076.28 4309.62,2107.36 4309.62,2199.68 4327.52,2217.58 4327.52,2231.07 4340.55,2244.09 4370.08,2244.09 v1(4389.76,2224.41)
UDM: Q1.F4 Q5.47 | length 797.4
  Top Layer w5: Q1.F4@4645.67,2322.83 v1(4665.36,2342.52) ; v1(4714.57,2952.76) 4716.54,2954.72 Q5.47@4767.72,2954.72
  Bottom Layer w5: v1(4665.36,2342.52) 4665.36,2411.42 4663.01,2413.76 4663.01,2414.16 4657.47,2419.7 4657.07,2419.7 4655.51,2421.26 4635.43,2421.26 4625.98,2430.7 4625.98,2933.07 4645.67,2952.76 v1(4714.57,2952.76)
UDQS: Q1.A3 Q5.51 | length 1013
  Top Layer w5: Q5.51@4767.72,3057.09 4652.99,3057.09 4627.4,3031.5 4627.4,2651.66 4702.09,2576.97 4809.22,2576.97 4891.89,2494.3 4891.89,2411.57 Q1.A3@4842.52,2362.2
VREF: C112.1 Q5.49 R37.2 R38.1 | length 191.2
  Top Layer w10: Q5.49@4767.72,3005.91 4879.92,3005.91 ; R37.2@4901.57,2966.54 4901.57,2984.25 4879.92,3005.91 ; R38.1@4901.57,3027.56 4879.92,3005.91
VS: Q1.R16 Q2.64 | length 352.2
  Top Layer w5: Q2.64@3956.69,1808.07 4249.02,1808.07 Q1.R16@4291.34,1850.39
WE: Q1.H3 Q5.21 | length 717.3
  Top Layer w5: Q5.21@4326.77,2929.13 v1(4385.83,2929.13) ; Q1.H3@4566.93,2362.2 v1(4586.62,2381.89)
  Bottom Layer w5: v1(4385.83,2929.13) 4586.62,2728.35 v1(4586.62,2381.89)
XTAL1: C31.2 Q2.21 R30.2 Y1.1 | length 362.2
  Top Layer w5: Q2.21@3877.95,2247.05 v1(3877.95,2303.15)
  Bottom Layer w5: v1(3877.95,2303.15) 3911.42,2336.61 Y1.1@3911.42,2348.43 3942.91,2348.43 ; R30.2@3901.57,2480.32 3937.01,2480.32 3956.69,2460.63 3956.69,2362.2 3942.91,2348.43 ; C31.2@3976.38,2346.46 3944.88,2346.46 3942.91,2348.43
XTAL2: C32.2 Q2.22 R30.1 Y1.3 | length 384.7
  Top Layer w5: v1(3856.77,2291.81) 3858.27,2290.31 Q2.22@3858.27,2247.05
  Bottom Layer w5: C32.2@3759.84,2336.61 3759.84,2381.89 3793.31,2415.35 Y1.3@3824.8,2415.35 ; R30.1@3834.65,2480.32 3824.8,2470.47 Y1.3@3824.8,2415.35 ; v1(3856.77,2291.81) 3858.27,2293.31 3858.27,2312.99 3868.11,2322.83 3868.11,2372.05 Y1.3@3824.8,2415.35
pads on no net: C9.0 C12.0 C14.0 C18.0 C20.0 C21.0 C22.0 C24.0 C26.0 C28.0 C31.0 C32.0 C45.0 C46.0 C47.0 C48.0 C49.0 C50.0 C51.0 C52.0 C53.0 C54.0 C63.0 C64.0 C65.0 C66.0 C69.0 C70.0 C71.0 C75.0 C76.0 C77.0 C82.0 C83.0 C94.0 C95.0 C96.0 C97.0 C102.0 C103.0 C104.0 C109.0 C110.0 C111.0 C113.0 C114.0 C115.0 C116.0 D1.0 D2.0 D3.0 D4.0 D5.0 D6.0 D7.0 D8.0 D9.0 D10.0 D11.0 D12.0 D13.0 D14.0 D15.0 D16.0 D17.0 D18.0 D19.0 D20.0 D21.0 D22.0 D23.0 D24.0 J1.12 J1.14 J2.13 J2.14 J3. J3.1 J3.3 J3.8 J3.19 J4.5 L1.0 L2.0 L3.0 L4.0 L7.0 L8.0 L9.0 L11.0 Q1.A5 Q1.A7 Q1.B6 Q1.B7 Q1.C7 Q1.C9 Q1.C16 Q1.D6 Q1.D9 Q1.D10 Q1.D11 Q1.D13 Q1.D15 Q1.D16 Q1.E3 Q1.E11 Q1.E12 Q1.E13 Q1.E15 Q1.E16 Q1.F3 Q1.F12 Q1.F13 Q1.F14 Q1.F15 Q1.G11 Q1.G12 Q1.G14 Q1.G15 Q1.G16 Q1.H11 Q1.H12 Q1.H13 Q1.H14 Q1.H16 Q1.J15 Q1.J16 Q1.K12 Q1.K13 Q1.L4 Q1.L5 Q1.L13 Q1.L14 Q1.L15 Q1.M1 Q1.M2 Q1.M4 Q1.M5 Q1.M6 Q1.M12 Q1.M14 Q1.N1 Q1.N2 Q1.N3 Q1.N4 Q1.N6 Q1.N9 Q1.N11 Q1.N12 Q1.N13 Q1.N14 Q1.P1 Q1.P3 Q1.P4 Q1.P5 Q1.P6 Q1.P8 Q1.R1 Q1.R2 Q2.33 Q2.45 Q5.14 Q5.17 Q5.19 Q5.25 Q5.43 Q5.50 Q5.53 Q6.0 Q7.0 Q7.4 Q8.0 Q8.1 Q8.6 Q8.8 Q9.0 Q10.0 Q10.1 Q10.6 Q10.8 Q11.0 Q11.1 Q11.6 Q11.8 Q12.0 R1.0 R2.0 R3.0 R4.0 R5.0 R6.0 R7.0 R8.0 R9.0 R10.0 R11.0 R12.0 R13.0 R14.0 R15.0 R16.0 R17.0 R18.0 R19.0 R20.0 R21.0 R22.0 R23.0 R24.0 R25.0 R26.0 R27.0 R28.0 R29.0 R30.0 R31.0 R32.0 R33.0 R34.0 R35.0 R36.0 R37.0 R38.0 R41.0
copper on no net: | length 5541.1
  Top Layer w5: 4153.54,2706.69 4153.54,2559.06 4235.47,2477.13 4239.12,2477.13 4271.65,2444.6 4271.65,2440.95 4271.65,2421.26 4291.34,2401.57 ; 4163.54,2696.85 4163.54,2696.69 4163.54,2568.74 4291.34,2440.94 ; 4173.23,2687.01 4173.23,2578.74 4311.02,2440.94 ; 4183.23,2687.01 4183.23,2588.43 4311.02,2460.63 4340.55,2460.63 4350.39,2450.79 ; 4193.23,2677.17 4193.23,2598.11 4318.72,2472.62 4342.7,2472.62 4370.08,2445.24 4370.08,2440.94 ; 4203.23,2667.32 4203.23,2602.25 4322.86,2482.62 4357.93,2482.62 4389.76,2450.79 4389.76,2421.26 4409.45,2401.57 ; 4213.23,2657.48 4213.23,2606.39 4327,2492.62 4367.61,2492.62 4370.08,2490.16 4409.45,2450.79 4409.45,2440.94 4409.45,2445.24 ; v1(4311.02,2303.15) 4330.71,2283.46 ; v1(4311.02,2342.52) 4330.71,2322.83 ; v1(4311.02,2381.89) 4330.71,2362.2 ; v1(4350.39,2342.52) 4370.08,2322.83 ; v1(4350.39,2381.89) 4370.08,2362.2 ; 4350.39,2431.1 4350.39,2450.79 ; 4370.08,2401.57 4350.39,2421.26 4350.39,2450.79 ; v1(4389.76,2303.15) 4409.45,2283.46 ; v1(4389.76,2342.52) 4409.45,2322.83 ; v1(4429.13,1870.08) 4448.82,1889.76 ; 4606.3,1889.76 4625.99,1870.08 ; 4606.3,1929.13 v1(4625.99,1909.45) ; 4606.3,2007.87 v1(4625.99,1988.19) ; 4606.3,2047.24 v1(4625.99,2027.56) ; 4645.67,1889.76 4665.36,1870.08 ; 4645.67,1929.13 v1(4665.36,1909.45) ; 4645.67,1968.5 v1(4665.36,1948.82) ; 4645.67,2007.87 v1(4665.36,1988.19) ; 4685.04,1850.39 4704.73,1830.71 ; 4685.04,1889.76 4704.73,1870.08 ; 4685.04,1968.5 v1(4704.73,1948.82) ; 4685.04,2007.87 v1(4704.73,1988.19) ; 4685.04,2047.24 v1(4704.73,2027.56) ; 4724.41,1850.39 v1(4744.1,1830.71) ; 4724.41,1889.76 v1(4744.1,1870.08) ; 4724.41,1968.5 v1(4744.1,1948.82) ; 4724.41,2047.24 v1(4744.1,2027.56) ; 4724.41,2086.61 v1(4744.1,2066.93) ; 4724.41,2125.98 v1(4744.1,2106.3) ; 4724.41,2244.09 v1(4744.1,2263.78) ; 4763.78,1850.39 v1(4783.47,1830.71) ; 4763.78,2125.98 v1(4783.47,2106.3) ; 4311.02,2440.94 4330.71,2440.94 4311.02,2440.94
  Bottom Layer w5: 4153.54,2608.27 4153.54,2490.16 4291.34,2352.36 4291.34,2322.83 v1(4311.02,2303.15) ; 4163.54,2588.58 4163.54,2490 v1(4311.02,2342.52) ; 4173.54,2578.74 4173.54,2496.04 4246.25,2423.33 4310.56,2359.02 4317.86,2359.02 4327.52,2349.36 4327.52,2342.06 4349.93,2319.65 4357.23,2319.65 4373.73,2303.15 v1(4389.76,2303.15) ; 4183.54,2578.74 4183.54,2558.58 4274,2468.13 4274.39,2468.13 4279.94,2462.58 4279.94,2412.97 4281.5,2411.42 v1(4311.02,2381.89) ; 4193.54,2583.51 4193.54,2568.66 4193.54,2562.72 4278.14,2478.13 4304.95,2478.13 4330.71,2452.37 4330.71,2362.2 v1(4350.39,2342.52) ; 4203.54,2578.74 4203.54,2568.11 4283.52,2488.13 4309.09,2488.13 4350.39,2446.82 v1(4350.39,2381.89) ; 4213.54,2619.06 4213.54,2572.25 4287.67,2498.13 4313.23,2498.13 4370.08,2441.28 4370.08,2362.2 v1(4389.76,2342.52)

## Polygon pours and split planes (outlines as drawn)
A5V on Top Layer "Top Layer-No Net" (solid, pour order 6): 3641.73,2696.4 3641.73,2552.34 3710.63,2552.34 3710.63,2509.13 3718.5,2500.89 3779.53,2500.89 3779.53,2480.32 3946.85,2480.32 3946.85,2706.69 3641.73,2706.69
P1V8 on Top Layer "Top Layer-No Net" (solid, pour order 4): 3513.78,2549.21 3513.78,2204.72 3690.94,2204.72 3681.1,2214.57 3681.1,2549.21
HDPVDD on Top Layer "Top Layer-No Net" (solid, pour order 2): 5147.64,2322.83 5354.33,2322.83 5354.33,2224.41 5364.17,2214.57 5344.49,2194.88 5314.96,2194.88 5305.12,2185.04 5305.12,2165.35 5295.28,2155.51 5147.64,2155.51
HDDVDD on Top Layer "Top Layer-No Net" (solid, pour order 4): 5265.75,2647.64 5875.98,2647.64 5875.98,2549.21 5265.75,2549.21
HDAVDD on Bottom Layer "Top Layer-No Net" (solid, pour order 8): 5334.65,2273.62 5334.65,2175.2 5757.87,2175.2 5757.87,2332.68 5748.03,2322.83 5334.65,2322.83

## Text inside footprints (layer, text, board x,y; h text height)
J1: Top Overlay "2" at 3974.49,1654.8 h50; Top Overlay "1" at 3974.49,1554.8 h50; Top Overlay "14" at 4774.49,1654.8 h50; Top Overlay "13" at 4774.49,1554.8 h50